# Altium PCB Receive_PCB_for_manufactor.PcbDoc
Units mm, origin at the board's own origin, x right, y up, seen from the top; angles counter-clockwise.
Board outline 143.5 x 45 mm, 2 copper layers (Top, Bottom); 66 components, 47 nets, 206 pads, 37 vias.
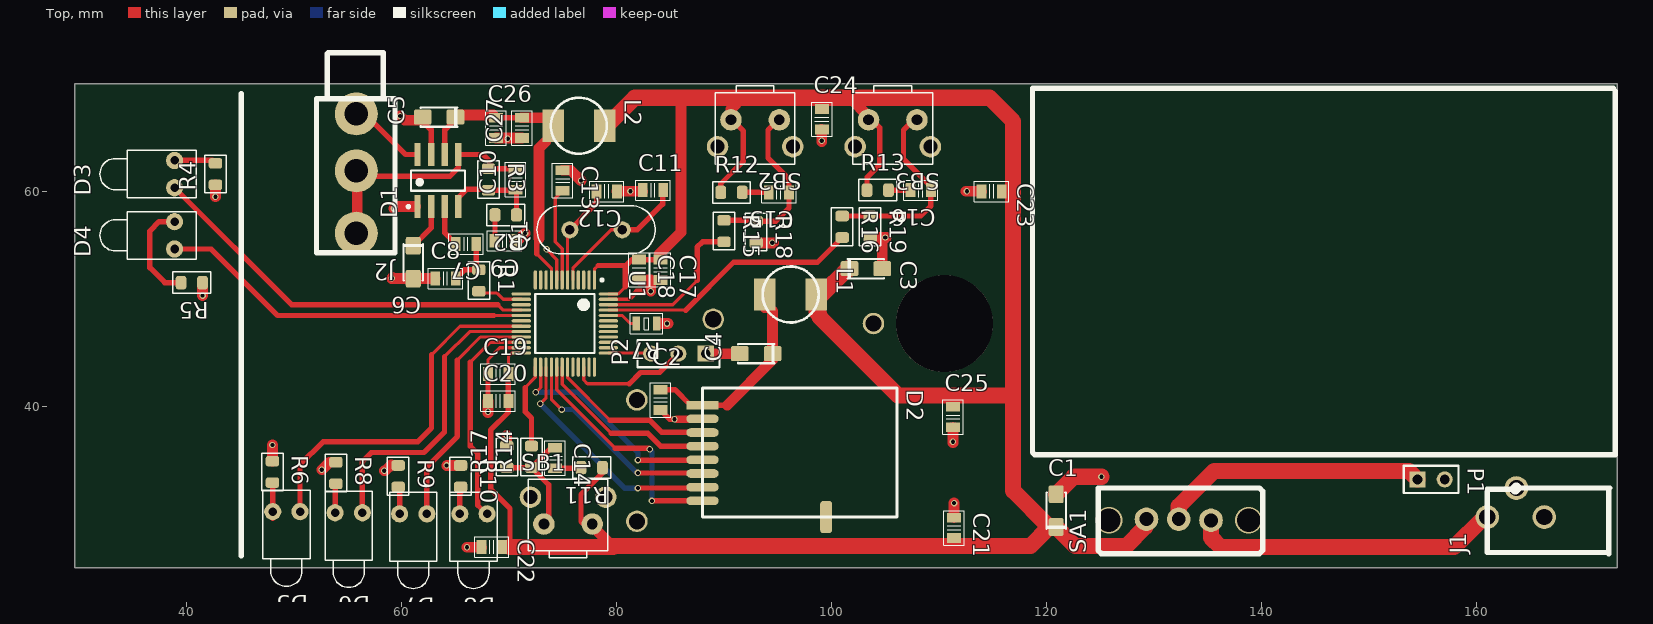
[diagram p0: Top view]
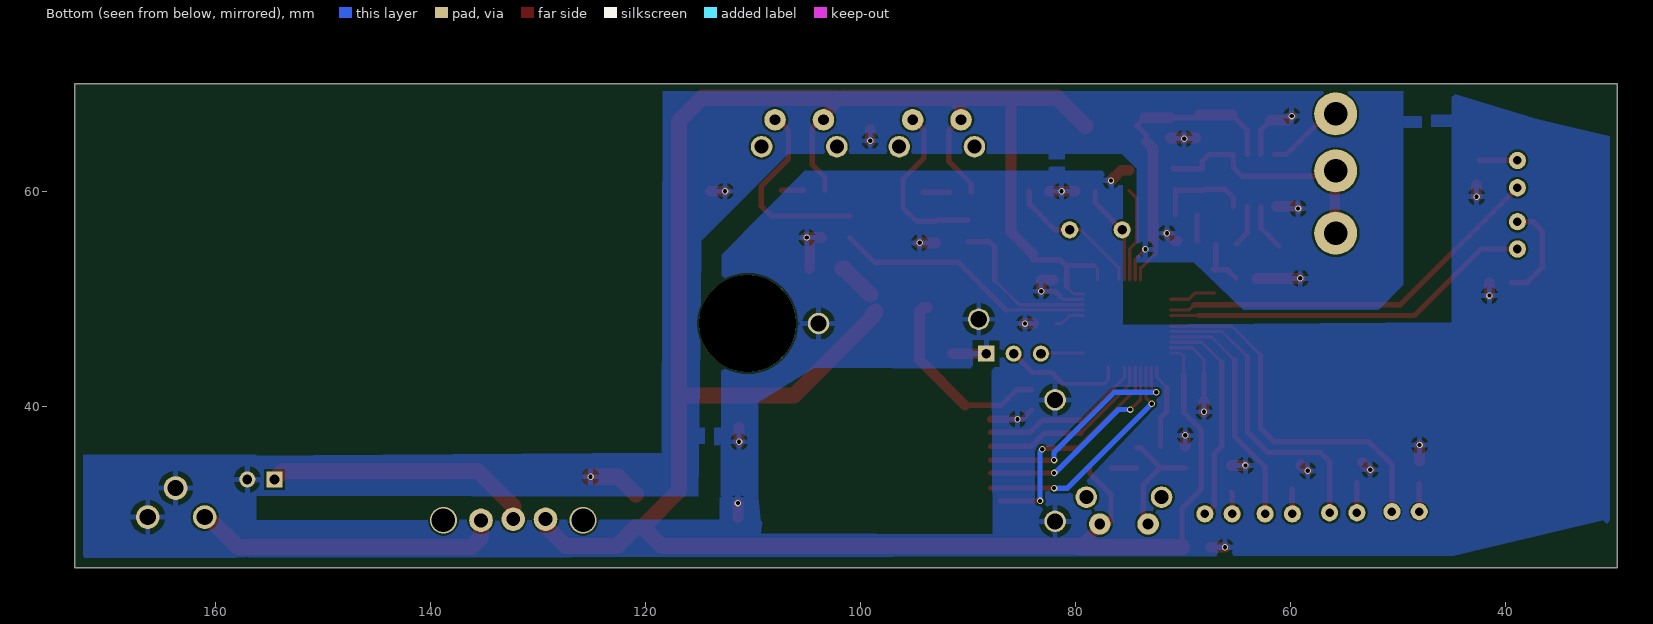
[diagram p1: Bottom view, seen from below]
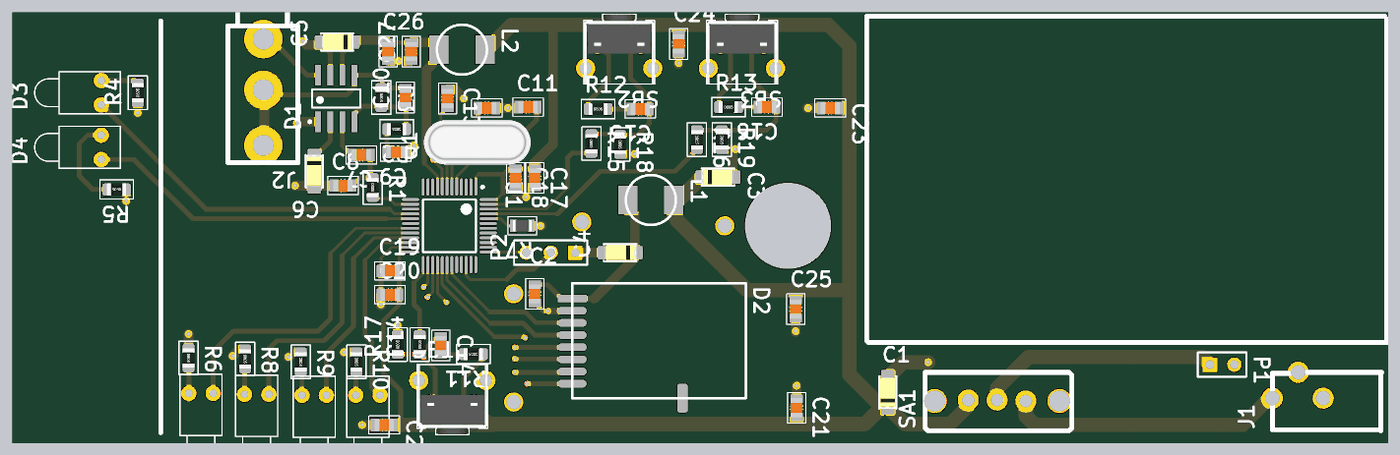
[diagram p2: 3D render of the assembled board from above, using the file's embedded part models]

## Layer stack, top to bottom
Top Solder: solder mask 0.0102, Solder Resist, Dk 3.5
Top: signal copper 0.0356
Dielectric 1: dielectric 0.32, FR-4, Dk 4.8
Bottom: signal copper 0.0356
Bottom Solder: solder mask 0.0102, Solder Resist, Dk 3.5

## Board outline
29.6,25 173.1,25 173.1,70 29.6,70

## Design rules (kind name [scope] priority, off if disabled: settings)
Clearance Clearance_poly [InNamedPolygon('BottomPoly') vs OnBottomLayer] p1: gap=0.7
Clearance Clearance_D5_0.1mm [(ObjectKind = 'Pad') And (Component = 'D5')] p2: gap=0.1
Clearance Clearance_0.1mm [(ObjectKind = 'Pad') And (Component = 'U2')] p3: gap=0.1
Clearance Clearance_1 [All] p4: gap=0.2
HoleSize [All] p1: absolutevalues=TRUE maxlimit=10 minlimit=0.25 maxpercent=80.000 minpercent=20.000
PlaneClearance [All] p1: clearance=0.5
PlaneConnect [All] p1: planeconnectstyle=Relief reliefexpansion=0.5 reliefentries=4 reliefconductorwidth=0.254 reliefairgap=0.3
PolygonConnect [All] p1: connectstyle=Relief reliefconductorwidth=0.5 reliefentries=4 polygonreliefangle="90 Angle" airgapwidth=0.5
RoutingVias [All] p1: holewidth=0.3 width=0.5 viastyle="Through Hole" minholewidth=0.25 minwidth=0.5 maxholewidth=0.7 maxwidth=2
SolderMaskExpansion [All] p1: expansion=0.102
Width Width_GND_VCC [(InNet('GND') OR InNet('VCC 3.3V') OR InNet('VCC 4.5V')  OR InNet('VCC 3.6V')  OR InNet('VCC')OR InNet('VCCA 3.6V'))] p1: maxlimit=3 minlimit=0.25 preferedwidth=1
Width Width_all [All] p2: maxlimit=1.5 minlimit=0.2 preferedwidth=0.3
26 further rules are at their usual default settings.

## Classes and differential pairs
component class Transmitter: C1 C2 C3 C4 C6 C7 C8 C9 C12 C13 C14 C15 C16 C17 C18 C19 C20 C21 C22 C23 C24 C25 C26 C27 D1 D2 D3 D4 D5 D6 D7 D8 J1 J2 L1 P1 P2 Q1 R1 R3 R4 R5 R6 R7 R8 R9 R10 R11 R12 R13 R14 R15 R16 R17 R18 R19 SA1 SB1 SB2 SB3 U1 U2

## Components (designator, comment, footprint, x,y, rotation, side; value= is the part's Value field where it differs from the comment)
C1 "4.7u" "EL Case A (3216-18)" 120.9,30.3 r90 top
C2 "100nF" C_0805 84.1,40.6 r90 top
C3 "4.7u" "EL Case A (3216-18)" 103.2,52.8 r0 top
C4 "4.7u" "EL Case A (3216-18)" 93,44.9 r180 top
C5 "4.7u" "EL Case A (3216-18)" 63.5,66.9 r180 top
C6 "4.7u" "EL Case A (3216-18)" 61.1,53.4 r270 top
C7 "100nF" C_0805 66,55.1 r180 top
C8 "100nF" C_0805 64.1,51.9 r0 top
C9 "100nF" C_0805 69.6,55.4 r180 top
C10 "100nF" C_0805 70.6,61.1 r90 top
C11 "20pF" C_0805 83.4,60.1 r0 top
C12 "20pF" C_0805 79.1,60 r180 top
C13 "100nF" C_0805 75,61 r270 top
C14 "100nF" C_0805 74.3,35.2 r270 top
C15 "100nF" C_0805 95.1,59.9 r180 top
C16 "100nF" C_0805 108.3,60.1 r180 top
C17 "1uF" C_0805 84.1,52.7 r270 top
C18 "100nF" C_0805 82.1,52.7 r270 top
C19 "4.7uF" C_0805 69,43 r0 top
C20 "100nF" C_0805 69,40.5 r0 top
C21 "100nF" C_0805 111.4,28.7 r270 top
C22 "100nF" C_0805 68.4,26.9 r0 top
C23 "100nF" C_0805 114.9,60 r0 top
C24 "100nF" C_0805 99.1,66.7 r90 top
C25 "100nF" C_0805 111.3,39 r90 top
C26 "1uF" C_0805 68.8,65.9 r90 top
C27 "100nF" C_0805 71.2,65.9 r90 top
D1 "MC34119" SO-8 63.4,61 r90 top
D2 "nrf24L01_modul" 24L01-M 88,40.1 r0 top
D3 "LED1" LED-1 38.9,61.6 r180 top
D4 "LED1" LED-1 38.9,55.9 r180 top
D5 "LED1" LED-1 49.3,30.2 r270 top
D6 "LED1" LED-1 55.1,30.1 r270 top
D7 "LED1" LED-1 61.1,30 r270 top
D8 "LED1" LED-1 66.7,30 r270 top
J1 "PWR_nokia" PowerNokia 166.3,29.7 r180 top
J2 "MonoJack3.5" MonoJack3.5 55.8,56.1 r180 top
L1 "L_SMD_5mm" L_SMD_4.8 98.6,50.4 r270 top
L2 "L_SMD_5mm" L_SMD_4.8 78.9,66.1 r270 top
P1 "Battery" HDR1X2 154.5,33.2 r0 top
P2 "SWD" HDR1X3 88.3,44.9 r180 top
Q1 "8MHz" HC49S_Q 78.1,56.4 r180 top
R1 "3k" R0805 67.2,51.7 r270 top
R2 "3k" R0805 69.7,57.8 r180 top
R3 "" R0805 68.1,61.1 r270 top
R4 "300" R0805 42.7,61.6 r90 top
R5 "300" R0805 40.5,51.5 r180 top
R6 "300" R0805 48,33.9 r270 top
R7 "0" R_0805 82.8,47.7 r180 top
R8 "300" R0805 53.9,33.8 r270 top
R9 "300" R0805 59.7,33.5 r270 top
R10 "300" R0805 65.5,33.5 r270 top
R11 "100" R0805 77.7,34.3 r180 top
R12 "100" R0805 90.7,59.9 r0 top
R13 "100" R0805 104.3,60.1 r0 top
R14 "330" R0805 72.1,35.3 r90 top
R15 "330" R0805 90,56.3 r270 top
R16 "330" R0805 101,56.7 r270 top
R17 "330" R0805 69.8,35.3 r90 top
R18 "330" R0805 93,56.2 r270 top
R19 "330" R0805 103.6,56.7 r270 top
SA1 "switchSlide" switchSplit_13mm 135.3,29.4 r180 top
SB1 "TS06V" TS-06V 75.5,32.3 r0 top
SB2 "TS06V" TS-06V 92.9,63.4 r180 top
SB3 "TS06V" TS-06V 105.7,63.4 r180 top
U1 "STM32F051C8T6" STM-LQFP48_N 75.2,47.7 r270 top

## Footprints (in the part's own frame and the unit in brackets; to place one, negate y for a bottom-side part, rotate by r counter-clockwise, add the part's x,y. Pads: shape width x height; smd on the part's side, far side on the other; paste and mask are expansions set on the pad)
24L01-M [mm]
  rect 3x0.8 smd: 1(0,0)
  oval 3x0.8 smd: 2(0,-1.27) 3(0,-2.54) 4(0,-3.81) 5(0,-5.08) 6(0,-6.35) 7(0,-7.62) 8(0,-8.89)
  rrect50% 1.1x3 smd: A1(11.5,-10.4)
  silkscreen extent 0,-10.4 18.1,1.6
C_0805 [mm] "Capacitor Pattern"
  rect 0.9x1.3 smd: 1(-0.95,0) 2(0.95,0)
  silkscreen extent -1.6,-0.95 1.6,0.95, body extent -1,-0.63 1,0.62, height 0.6
"EL Case A (3216-18)" [mm] "Capacitor, SM Tantalum; Body 3.2 x 1.6 mm (LxW typ)"
  rrect25% 1.65x1.4 smd: 1(-1.525,0) 2(1.525,0)
  silkscreen extent -1.7,-0.9 1.7,0.9, body extent -1.6,-0.8 1.6,0.8, height 1.61
HC49S_Q [mm]
  round 1.6 hole 0.9: 1(-2.44,-0.02) 2(2.44,-0.02)
  silkscreen extent -5.5,-2.27 5.5,2.23, body extent -5.5,-2.27 5.5,2.23, height 3.7
HDR1X2 [mm] "Connector; Header; 2 Position"
  rect 1.5x1.5 hole 0.9: 1(0,0)
  round 1.5 hole 0.9: 2(2.54,0)
  silkscreen extent -1.27,-1.27 3.81,1.27
HDR1X3 [mm] "Connector; Header; 3 Position"
  rect 1.5x1.5 hole 0.9: 1(0,0)
  round 1.5 hole 0.9: 2(2.54,0) 3(5.08,0)
  silkscreen extent -1.27,-1.27 6.35,1.27
L_SMD_4.8 [mm]
  rect 3x2 smd: 1(0,0) 2(0,-4.8)
  silkscreen extent -2.61,-5 2.61,0.21
LED-1 [mm] "LED; 2 Leads"
  round 1.6 hole 0.8: 1(0,1.27) 2(0,-1.27)
  silkscreen extent -2,-2.2 6.95,2.2
MonoJack3.5 [mm] "1/8\" 3.5mm Phono/Mono Phone Panel Jack"
  round 4 hole 2.2: 1(0,0) 2(0,-5.8) 3(0,-11.1)
  silkscreen extent -3.6,-16.8 3.7,1.8
PowerNokia [mm]
  round 2.2 hole 1.5: 1(0,0) 2(2.6,-2.7) 3(5.3,0)
  silkscreen extent -6.1,-2.7 5.3,3.4
R0805 [mm]
  rrect50% 1x1.25 smd: 1(-1,0) 2(1,0)
  silkscreen extent -1.75,-1 1.75,1, body extent -1,-0.62 1,0.63, height 0.6
R_0805 [mm] "Resistor Pattern"
  rect 0.7x1.3 smd: 1(-0.95,0) 2(0.95,0)
  silkscreen extent -1.5,-0.95 1.5,0.95, body extent -1,-0.6 1,0.6, height 0.5
SO-8 [mm] "PLASTIC PACKAGE  CASE 751–05  (SO–8)  ISSUE P"
  rect 2.15x0.6 smd: 1(-2.425,1.905) 2(-2.425,0.635) 3(-2.425,-0.635) 4(-2.425,-1.905) 5(2.425,-1.905) 6(2.425,-0.635) 7(2.425,0.635) 8(2.425,1.905)
  silkscreen extent -2.55,-2.5 0.95,2.88, body extent -2,-2.5 2,2.5, height 1.75
STM-LQFP48_N [mm] "QFP, 48-Leads, Body 7x7mm, Pitch 0.5mm, IPC Medium Density"
  oval 1.8x0.3 smd: 1(-4.05,2.75) 2(-4.05,2.25) 3(-4.05,1.75) 4(-4.05,1.25) 5(-4.05,0.75) 6(-4.05,0.25) 7(-4.05,-0.25) 8(-4.05,-0.75) 9(-4.05,-1.25) 10(-4.05,-1.75) 11(-4.05,-2.25) 12(-4.05,-2.75) 25(4.05,-2.75) 26(4.05,-2.25) 27(4.05,-1.75) 28(4.05,-1.25) 29(4.05,-0.75) 30(4.05,-0.25) 31(4.05,0.25) 32(4.05,0.75) 33(4.05,1.25) 34(4.05,1.75) 35(4.05,2.25) 36(4.05,2.75)
  oval 0.3x1.8 smd: 13(-2.75,-4.05) 14(-2.25,-4.05) 15(-1.75,-4.05) 16(-1.25,-4.05) 17(-0.75,-4.05) 18(-0.25,-4.05) 19(0.25,-4.05) 20(0.75,-4.05) 21(1.25,-4.05) 22(1.75,-4.05) 23(2.25,-4.05) 24(2.75,-4.05) 37(2.75,4.05) 38(2.25,4.05) 39(1.75,4.05) 40(1.25,4.05) 41(0.75,4.05) 42(0.25,4.05) 43(-0.25,4.05) 44(-0.75,4.05) 45(-1.25,4.05) 46(-1.75,4.05) 47(-2.25,4.05) 48(-2.75,4.05)
  silkscreen extent -4.17,-2.75 2.75,3.58, body extent -3.5,-3.5 3.5,3.5, height 1.6
switchSplit_13mm [mm] "SK12N16E04-2000"
  round 2.2 hole 1.3: 1(0,0) 2(3,-0.1) 3(6,-0.1)
  silkscreen extent -4.8,-3 10.5,3.1
TS-06V [mm]
  round 2 hole 1.3 unplated: 0(-3.5,-0.75)
  round 2 hole 1.3: 0(3.5,-0.75)
  round 2 hole 1: 1(2.25,-3.25) 2(-2.25,-3.25)
  silkscreen extent -3.7,-6.4 3.7,0.9, body extent -3.7,-6.4 3.7,0.9, height 7

## Part data
C1 C3 C4 C5 C6: library part "EL 10u/16V Tant.", "El Case A (2012-12)"
C2 C7 C8 C9 C10 C11 C12 C13 C14 C15 C16 C17 C18 C19 C20 C21 C22 C23 C24 C25 C26 C27: library part C0805, "Capacitor"
D3 D4 D5 D6 D7 D8: "Typical RED GaAs LED"
P1: library part "Header 2", "Header, 2-Pin"
P2: library part "Header 3", "Header, 3-Pin"
Q1: library part Q
R1 R2 R3 R4 R5 R6 R8 R9 R10 R11 R12 R13 R14 R15 R16 R17 R18 R19: library part R-0805, "SMD 0805 0.1W 5% 150V"
R7: library part R0805, "Resistor"
SB1 SB2 SB3: library part "Buton TS-06V"
U1: "ARM Cortex-M0 32-bit MCU, 64 KB Flash, 8 KB Internal RAM, 39 I/Os, 48-pin LQFP, -40 to 85 degC, Tray"

## Free pads (board coordinates)
  round 2 hole 1.5: 0(81.9,29.3) 1(81.9,40.6) 2(89,48.1) 3(103.9,47.7)
  round 9 hole 9 unplated: 0(110.5,47.7)

## Via types
v1: diameter 0.6, hole 0.4, Top to Bottom, 35 vias
v2: diameter 2.5, hole 2.2, Top to Bottom, 2 vias

## Nets (pads, with @x,y where several pads share a name; then routed paths per layer and width w, separated by ;. In a path a pad name is that pad's centre, name@x,y a point inside that pad or via, vN(x,y) a via of type N, cw(c..) or ccw(c..) an arc to the next point about the centre after c; other vN are vias at no path point)
BAT_LOW: D4.1 U1.17 | length 34.8
  Top w0.3: 68.6,48.45 U1.17
  Top w0.5: D4.1 42.3,54.63 48.48,48.45 68.6,48.45
CE: D2.3 U1.31 | length 15.5
  Top w0.3: U1.31 75.45,42.65 79.4,38.7
  Top w0.5: 79.4,38.7 83.1,38.7 84.2,37.6 D2.3@87.9,37.6
CH1: D5.1 U1.19 | length 34.3
  Top w0.3: 62.8,44.8 65.45,47.45 U1.19
  Top w0.5: D5.1 50.57,34.57 52.7,36.7 61.5,36.7 62.8,38 62.8,44.8
CH2: D6.1 U1.20 | length 28.7
  Top w0.3: 64,44.6 66.35,46.95 U1.20
  Top w0.5: D6.1 56.37,34.87 57.2,35.7 62.1,35.7 64,37.6 64,44.6
CH3: D7.1 U1.21 | length 22.7
  Top w0.3: 65.2,44.3 67.35,46.45 U1.21
  Top w0.5: D7.1@62.37,29.6 62.37,34.37 65.2,37.2 65.2,44.3
CH4: D8.1 U1.22 | length 20.4
  Top w0.3: 66.4,44.1 68.25,45.95 U1.22
  Top w0.5: 66.4,44.1 66.4,36.3 67.1,35.6 67.1,30.8 D8.1@68,29.9
CH_CHNG: R14.2 U1.25 | length 8
  Top w0.3: 71.5,41.75 72.45,42.7 U1.25
  Top w0.5: 71.5,41.75 71.5,39.5 72.1,38.9 R14.2
CSN: D2.4 U1.30 | length 16.9
  Top w0.3: U1.30 74.95,42.05 79.5,37.5
  Top w0.5: 79.5,37.5 82.9,37.5 84.1,36.3 D2.4@87.9,36.3
DAC_OUT: R1.2 U1.14 | length 4.3
  Top w0.3: R1.2@67.1,50.55 68.85,50.55 69.45,49.95 U1.14
GND: C1.2 C2.1 C3.2 C4.2 C5.2 C6.2 C8.1 C9.1 C11.1 C12.1 C13.1 C17.2 C18.2 C19.1 C20.1 C21.1 C22.1 C23.1 C24.1 C25.1 C26.1 C27.1 D1.1 D1.7 D2.2 J1.1 J1.2 P1.2 P2.1 pad.0@81.9,29.3 pad.1 pad.2 pad.3 R4.1 R5.1 R6.1 R7.1 R8.1 R9.1 R10.1 R17.2 R18.2 R19.2 U1.8 U1.23 U1.47 | length 72.1
  Top w0.3: C19.1 68.05,44.35 69.15,45.45 U1.23 ; v1(73.5,54.6) 74.45,53.65 U1.8 ; U1.47 81.15,49.95 81.4,50.2
  Top w0.5: C5.2@61.875,66.6 62.765,65.71 D1.7 ; C20.1 C19.1 ; 81.4,50.2 81.9,50.7 v1(83.2,50.7) ; C2.1 84.95,38.8 v1(85.4,38.8) v1@85.6,38.8
  Top w0.7: v1@85.6,38.8 D2.2@87.9,38.8
  Top w1: v1(41.5,50.3) R5.1 ; v1(42.7,59.5) R4.1 ; R6.1 v1(48,36.4) ; v1(52.6,34.1) R8.1@53.3,34.8 ; v1(58.4,34) 58.5,34 59.05,34.55 ; v1@59.175,51.975 v1(59.1,51.9) C8.1 ; v1(59.3,58.4) 59.475,58.575 D1.1@61.3,58.575 ; v1(59.9,67) 60.3,66.6 C5.2@61.875,66.6 ; v1@64.222,34.478 64.243,34.5 R10.1 ; v1(66.1,26.9) C22.1 ; v1@68.05,39.4 C20.1 ; C26.1 C27.1 ; R17.2 v1(69.8,37.3) ; C9.1 70.8,55.4 v1(71.5,56.1) ; C13.1 75.75,61.95 v1(76.7,61) ; C12.1 C11.1@82.45,60 ; C18.2 83.2,51.75 v1(83.2,50.7) ; R7.1@83.9,47.7 v1@84.8,47.7 ; P2.1 C4.2 ; R18.2 v1@94.6,55.2 ; v1@99.1,64.6 C24.1 ; R19.2 v1(105,55.7) ; C3.2 104.725,55.425 v1(105,55.7) ; v1@105.1,55.7 v1(105,55.7) ; v1@111.3,36.6 C25.1 ; C21.1 v1(111.4,31) ; v1@112.5,60 C23.1
  Top w1.5: C1.2 122.526,33.451 v1(125.11,33.451)
  other v1: 64.2,34.5 111.3,36.7 68.05,39.5 84.7,47.7 94.5,55.2 81.3,60 112.6,60 99.1,64.7 69.9,64.9
IRQ: D2.8 U1.29 | length 21.6
  Top w0.3: U1.29 74.45,41.55 79.9,36.1 ; v1@83,36.1 v1(83.1,36)
  Top w0.5: 79.9,36.1 v1@83,36.1 ; v1(83.3,31.2) D2.8@87.01,31.2
  Bottom w0.5: v1(83.1,36) 83.3,35.8 v1(83.3,31.2)
MISO: D2.7 U1.27 | length 21.9
  Top w0.3: v1(72.9,40.25) 73.45,40.8 U1.27
  Top w0.5: v1(82,32.4) D2.7@87.9,32.4
  Bottom w0.5: v1(72.9,40.25) 80.775,32.375 81.975,32.375 v1(82,32.4)
MOSI: D2.6 U1.28 | length 19.8
  Top w0.3: U1.28 73.95,40.65 v1(74.9,39.7)
  Top w0.5: v1(82,33.8) D2.6@87.9,33.8
  Bottom w0.5: v1(74.9,39.7) 76,39.7 v1@82,33.7
NetC2_2: C2.2 C4.1 D2.1 L1.2 | length 18.2
  Top w0.5: C2.2 85.45,41.55 86.9,40.1 D2.1 90.3,40.1
  Top w1: 90.3,40.1 94.525,44.325 C4.1 94.525,48.875 94.2,49.2 L1.2@93.8,49.2
NetC6_1: C6.1 D1.2 | length 4.3
  Top w0.5: C6.1 62.765,56.59 D1.2
NetC7_1: C7.1 C8.2 R1.1 | length 5
  Top w0.5: C8.2 65.85,52.7 R1.1 66.95,52.95 C7.1
NetC7_2: C7.2 D1.3 | length 3.9
  Top w0.5: D1.3 64.035,56.115 C7.2
NetC9_2: C9.2 R2.2 | length 2.4
  Top w0.5: C9.2 68.7,55.45 R2.2
NetC10_1: C10.1 D1.4 R2.1 R3.2 | length 9
  Top w0.5: D1.4 65.305,59.405 66.1,60.2 68,60.2 R3.2 70.65,60.1 70.7,60.15 R2.1
NetC10_2: C10.2 D1.5 J2.1 J2.2 R3.1 | length 24
  Top w0.5: J2.2@55.2,61.4 64.5,61.4 65.305,62.205 D1.5 67.575,63.425 68.2,62.8 68.2,62.1 70.85,62.1 C10.2@70.9,62.15
  Top w1: J2.1@55.9,55.9 J2.2@55.9,61.7
NetC13_2: C13.2 U1.7 | length 8.9
  Top w0.3: U1.7 74.95,54.65 74.3,55.3 74.3,59.35 C13.2
NetC14_1: C14.1 R14.1 R17.1 SB1.2 | length 11.5
  Top w0.5: R17.1 R14.1 ; SB1.2@73.7,28.7 73.7,32.7 R14.1 ; C14.1 73.95,36.15 R14.1
NetC14_2: C14.2 R11.2 | length 2.4
  Top w0.5: C14.2 76.65,34.25 R11.2
NetC15_1: C15.1 R15.1 R18.1 SB2.2 | length 16.2
  Top w0.5: R15.1 92.9,57.3 R18.1 94.8,57.2 96.05,58.45 C15.1 96.05,61.15 94.1,63.1 94.1,65.7 SB2.2@95.15,66.75
NetC15_2: C15.2 R12.2 | length 2.5
  Top w0.5: R12.2 C15.2
NetC16_1: C16.1 R16.1 R19.1 SB3.2 | length 21.1
  Top w0.3: R16.1 R19.1
  Top w0.5: R16.1 R19.1 108.3,57.7 109.25,58.65 C16.1 109.25,60.45 106.7,63 106.7,65.7 SB3.2@107.95,66.95
NetC16_2: C16.2 R13.2 | length 2.1
  Top w0.5: R13.2 C16.2
NetD1_8: D1.8 J2.3 | length 7.2
  Top w0.5: J2.3@56.2,67.8 56.2,67.6 60.375,63.425 D1.8
NetD3_2: D3.2 R4.2 | length 3.5
  Top w0.5: D3.2 R4.2@42.43,62.87
NetD4_2: D4.2 R5.2 | length 9.5
  Top w0.5: D4.2 37.47,57.17 36.6,56.3 36.6,52.9 38,51.5 R5.2
NetD5_2: D5.2 R6.2 | length 3.2
  Top w0.5: D5.2@48.03,29.6 R6.2@48.03,32.8
NetD6_2: D6.2 R8.2 | length 2.9
  Top w0.5: D6.2@53.83,30 R8.2@53.83,32.9
NetD7_2: D7.2 R9.2 | length 2.8
  Top w0.5: D7.2@59.83,29.5 R9.2@59.83,32.3
NetD8_2: D8.2 R10.2 | length 2.4
  Top w0.5: D8.2@65.43,29.6 65.43,31.93 R10.2@65.5,32
NetJ1_3: J1.3 SA1.1 | length 27.8
  Top w1.5: SA1.1@135.3,28.7 135.3,27.8 136.2,26.9 157.9,26.9 J1.3@160.65,29.65
NetP1_1: P1.1 SA1.2 | length 25
  Top w1.5: SA1.2@132.3,29.6 132.3,30.7 135.6,34 153.7,34 P1.1
NetR7_2: R7.2 U1.44 | length 2.9
  Top w0.3: U1.44 80.55,48.45 81.3,47.7 R7.2
OSC_IN: C11.2 Q1.1 U1.5 | length 13.1
  Top w0.3: U1.5 75.95,52.85 79.52,56.42 Q1.1
  Top w0.5: Q1.1 81.92,56.42 84.3,58.8 84.3,59.95 C11.2@84.35,60
OSC_OUT: C12.2 Q1.2 U1.6 | length 9.3
  Top w0.3: U1.6 Q1.2@75.45,56.42
  Top w0.5: Q1.2 78.15,58.91 C12.2
RX: D3.1 U1.16 | length 37
  Top w0.3: 68.97,49.43 69.45,48.95 U1.16
  Top w0.5: D3.1 49.8,49.43 68.97,49.43
SCK: D2.5 U1.26 | length 21
  Top w0.3: v1@72.575,41.225 72.575,41.375 72.95,41.75 U1.26
  Top w0.5: v1(82,35) D2.5@87.9,35
  Bottom w0.5: v1(72.5,41.3) 76.4,41.3 82,35.7 v1(82,35)
SWCLK: P2.3 U1.37 | length 3.8
  Top w0.3: U1.37 P2.3@83,44.95
SWDAT: P2.2 U1.34 | length 11.3
  Top w0.3: U1.34 76.95,42.45 77.3,42.1 81.2,42.1
  Top w0.5: 81.2,42.1 82.25,43.15 84.01,43.15 P2.2
"VCC 3.6V": C1.1 C3.1 C17.1 C18.1 C19.2 C20.2 C21.2 C22.2 C23.2 C24.2 C25.2 L1.1 L2.1 R11.1 R12.1 R13.1 SA1.3 SB1.1 SB2.1 SB3.1 U1.1 U1.24 U1.48 | length 243.1
  Top w0.3: C19.2 69.95,44.65 70.25,44.95 U1.24 ; U1.1 77.95,52.7 77.95,52.75 78.3,53.1 ; U1.48 80.15,50.45 80.8,51.1
  Top w0.5: C19.2 C20.2 69.95,39.45 68.3,37.8 68.3,32.3 70.1,30.5 70.1,26.9 ; SB1.1 76.95,29.05 76.7,29.3 76.7,31.8 78.7,33.8 R11.1 ; 78.3,53.1 80.8,53.1 ; 80.8,51.1 80.8,53 81.45,53.65 C18.1 C17.1@84,53.65 ; R12.1 89.7,60.7 91.8,62.8 91.8,65.6 SB2.1@90.65,66.75 ; R13.1 103.3,61.3 104.5,62.5 104.5,65.9 SB3.1@103.45,66.95
  Top w1: SB1.1@77.65,28.95 79.6,27 ; 84,54.2 86,56.2 86,68.7 ; SB2.1@90.65,66.75 90.65,67.65 91.7,68.7 ; 102.2,68.7 101.7,68.7 SB3.1@103.45,66.95 ; C1.1@120.275,28.775 C1.1
  Top w1.5: 70.1,26.9 79.7,26.9 ; L2.1@79.1,66.1 81.7,68.7 86,68.7 91.7,68.7 101.7,68.7 ; 79.6,27 118.5,27 120.275,28.775 116.9,32.15 116.9,41 ; 98.6,48.8 98.9,48.5 98.9,48.3 106.2,41 116.9,41 ; L1.1@99.1,50.4 101.5,52.8 C3.1 ; 102.2,68.7 114.7,68.7 116.9,66.5 116.9,41 ; C1.1 122.675,27 127.4,27 SA1.3@129.2,28.8
"VCCA 3.6V": C5.1 C26.2 C27.2 D1.6 L2.2 U1.9 | length 28.4
  Top w0.3: 72.6,54.2 73.95,52.85 U1.9
  Top w0.5: D1.6 64.035,65.71 C5.1@64.925,66.6 ; C26.2@68.55,67.1 C26.2 C27.2 ; 72.6,54.2 72.6,55.4 72.8,55.6 ; L2.2@73.4,64.6 73.4,65.2 74.3,66.1 L2.2@73.55,66.85
  Top w1: C5.1@65.425,67.1 C26.2@68.55,67.1 ; C27.2 L2.2@73.55,66.85 ; 72.8,55.6 72.8,64 L2.2@73.4,64.6
VOL_DWN: R15.2 U1.46 | length 15
  Top w0.3: U1.46 85.25,49.45 87.5,51.7
  Top w0.5: 87.5,51.7 87.5,54.8 88,55.3 R15.2
VOL_UP: R16.2 U1.45 | length 24.5
  Top w0.3: U1.45 86.45,48.95
  Top w0.5: 86.45,48.95 90.9,53.4 98.7,53.4 R16.2
pads on no net: D2.A1 SB1.0 SB2.0 SB3.0 U1.2 U1.3 U1.4 U1.10 U1.11 U1.12 U1.13 U1.15 U1.18 U1.32 U1.33 U1.35 U1.36 U1.38 U1.39 U1.40 U1.41 U1.42 U1.43
copper on no net:
  other v2: 125.8,29.4 138.8,29.4

## Polygon pours and split planes (outlines as drawn)
GND on Bottom "Top-No Net" (solid, pour order 13): 45,69.1 37,66.7 30.3,65.1 30.3,29.4 30.6,29.1 30.9,29.4 44.8,26.1 157.2,25.9 157.2,29.4 109.1,29.5 109.3,28.2 87.7,28.1 87.8,43.5 104.3,43.6 109.5,40.4 109.5,31.4 113,31.4 112.9,54.1 105.2,61.9 75.6,61.9 75.6,47.6 45,47.8
GND on Bottom "Top-No Net" (solid, pour order 12): 49.5,69.3 49.5,51.3 51.8,49 64.4,49 69,53.4 74.3,53.4 74.3,62.1 75.7,63.5 106.7,63.5 114.8,55.4 115.1,31.6 157.4,31.7 157.5,35.4 118.5,35.7 118.4,69.3
GND on Bottom "Top-No Net" (solid, pour order 15): 156.227,35.5 156.2,26 158.173,25.9 172.22,25.9 172.3,26.2 172.3,35.5
GND on Bottom "Top-No Net" (solid, pour order 16): 109.5,31.523 113.042,31.523 113.1,31.6 113.1,29.1 109.4,29.1 109.3,29.232
GND on Bottom "Top-No Net" (solid, pour order 11): 45,67.1 46.9,67.1 46.9,66 45,66
GND on Bottom "Top-No Net" (solid, pour order 14): 49.4,67 47.9,67 47.8,66.9 47.8,65.9 49.428,65.9 49.5,65.972 49.5,67
GND on Bottom "Top-No Net" (solid, pour order 17): 114.9,38 114.5,38 114.5,36.5 115,36.5 115.1,36.6 115.1,38
GND on Bottom "Top-No Net" (solid, pour order 18): 113,38 113.7,38 113.6,37.9 113.6,36.4 113.028,36.4 112.978,36.45
GND on Bottom "Top-No Net" (solid, pour order 19): 81,63.5 81,63 82.5,63 82.5,63.5 81,63.5
GND on Bottom "Top-No Net" (solid, pour order 20): 81,61.6 81,62.3 82.4,62.3 82.5,62.2 82.5,61.6

## Silkscreen, mask and mechanical layers (free items; w line width, h text height)
Top Overlay:
  lines w0.5: 45.1,26.1 45.1,69.1 ; 172.7,69.6 118.7,69.6 118.7,35.7 118.9,35.5 172.9,35.5 172.9,69.3
Plata:
  lines w0.5: 30.6,69.7 30.6,67.8 30.6,25.7 172.9,25.7 172.9,69.8 30.6,69.8